# Altium PCB Ant_Robot_Controller.PcbDoc
Units mil, origin at the board's own origin, x right, y up, seen from the top; angles counter-clockwise.
Board outline 5605.03 x 1845.03 mil, 2 copper layers (Top Layer, Bottom Layer); 8 components, 11 nets, 47 pads, 18 vias.
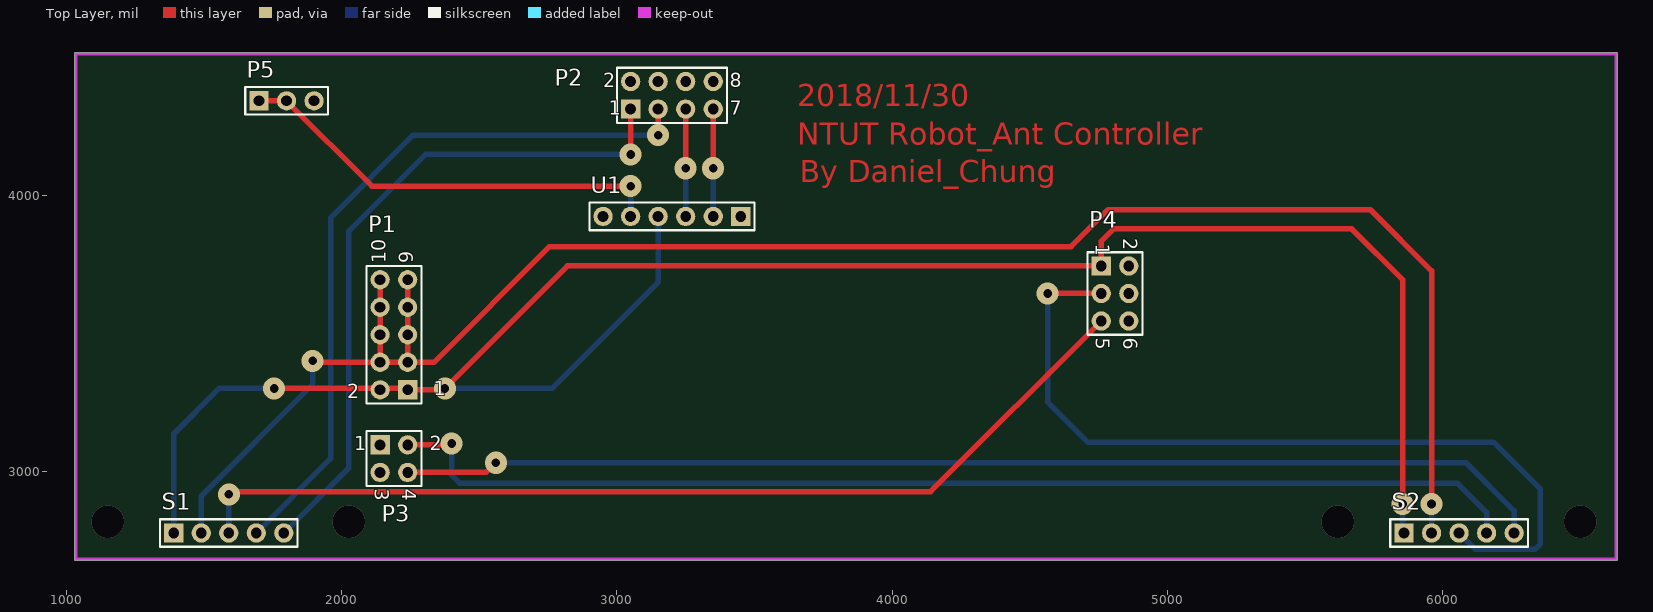
[diagram p0: Top Layer view]
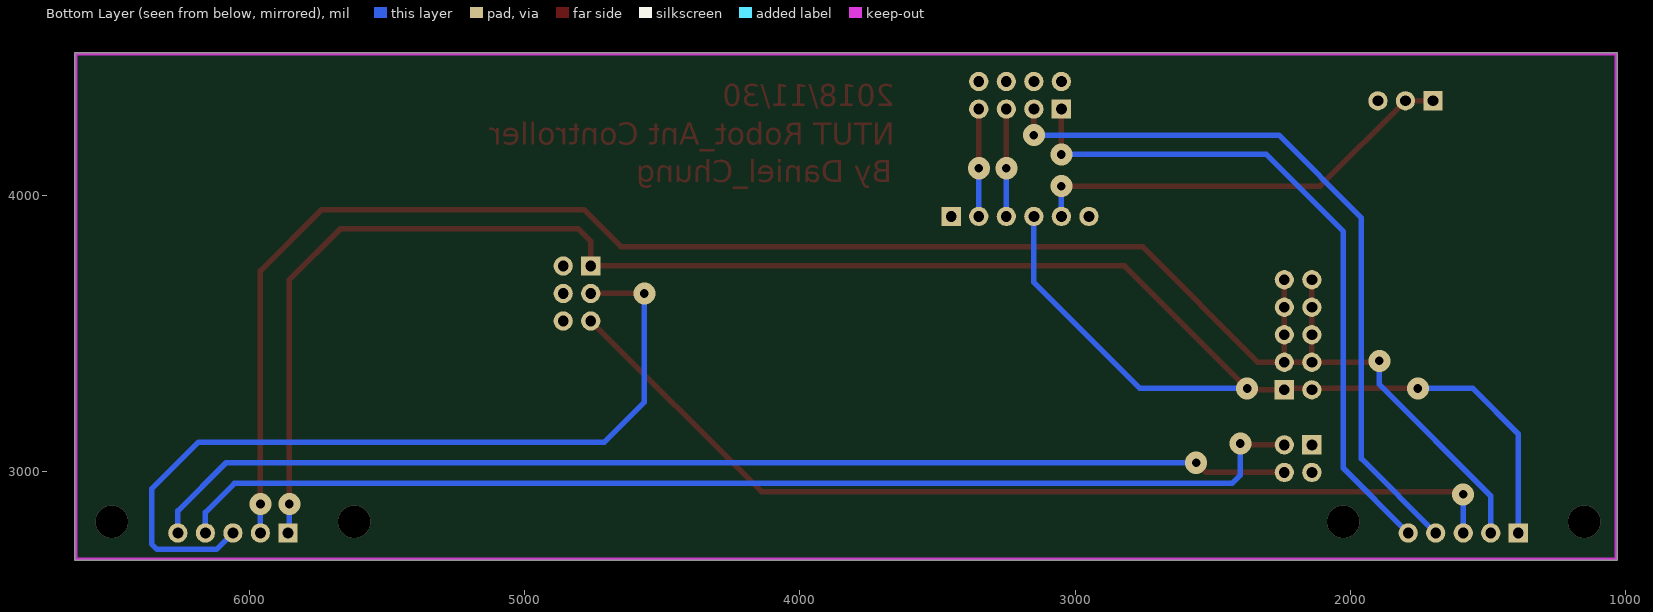
[diagram p1: Bottom Layer view, seen from below]

## Layer stack, top to bottom
Top Solder: solder mask 0.4, Solder Resist, Dk 3.5
Top Layer: signal copper 1.4
Dielectric 1: dielectric 12.6, FR-4, Dk 4.8
Bottom Layer: signal copper 1.4
Bottom Solder: solder mask 0.4, Solder Resist, Dk 3.5

## Board outline
1035,2674.99 cw(c1035,2680) 1029.98,2680 1029.98,4515 cw(c1035,4515) 1035,4520.02 6630,4520.02 cw(c6630,4515) 6635.01,4515 6635.02,2680 cw(c6630,2680) 6630,2674.99

## Design rules (kind name [scope] priority, off if disabled: settings)
Clearance [All] p1: gap=10 ignorepadtopadclearanceinfootprint=FALSE except(0: Arc-Hole Track-Hole SMDPad-Hole THPad-Hole Via-Hole Fill-Hole Poly-Hole Region-Hole Text-Hole)
PolygonConnect [All] p1: connectstyle=Relief reliefconductorwidth=10 reliefentries=4 polygonreliefangle="90 Angle" airgapwidth=10
RoutingVias [All] p1: holewidth=28 width=50 viastyle="Through Hole" minholewidth=28 minwidth=50 maxholewidth=28 maxwidth=50
SolderMaskExpansion [All] p1: expansion=4 istentingtop=FALSE
Width [All] p1: maxlimit=30 minlimit=20 preferedwidth=25
30 further rules are at their usual default settings.

## Components (designator, comment, footprint, x,y, rotation, side; value= is the part's Value field where it differs from the comment)
P1 "Power" HDR2X5 2240,3295 r90 top
P2 "ADC23_UART910" HDR2X4 3050,4315 r0 top
P3 "ADC23" HDR2X2 2140,3095 r270 top
P4 "SW" HDR2X3 4760,3745 r270 top
P5 "power_5v" HDR1X3 1700,4345 r0 top
S1 "Joy_Stick" HDR1X5 1390,2775 r0 top
S2 "Joy_Stick" HDR1X5 5860,2775 r0 top
U1 "HC05" HDR1X6 3450,3925 r180 top

## Footprints (in the part's own frame and the unit in brackets; to place one, negate y for a bottom-side part, rotate by r counter-clockwise, add the part's x,y. Pads: shape width x height; smd on the part's side, far side on the other; paste and mask are expansions set on the pad)
HDR1X3 [mil] "Connector; Header; 3 Position"
  rect 70x70 hole 39.37: 1(0,0)
  round 70 hole 39.37: 2(100,0) 3(200,0)
  silkscreen extent -50,-50 250,50
HDR1X5 [mil] "Connector; Header; 5 Position"
  rect 70x70 hole 39.37: 1(0,0)
  round 70 hole 39.37: 2(100,0) 3(200,0) 4(300,0) 5(400,0)
  silkscreen extent -50,-50 450,50
HDR1X6 [mil] "Connector; Header; 6 Position"
  rect 70x70 hole 39.37: 1(0,0)
  round 70 hole 39.37: 2(100,0) 3(200,0) 4(300,0) 5(400,0) 6(500,0)
  silkscreen extent -50,-50 550,50
HDR2X2 [mil] "Connector; Header; 2x2 Position"
  rect 70x70 hole 39.37: 1(0,0)
  round 70 hole 39.37: 2(0,100) 3(100,0) 4(100,100)
  silkscreen extent -50,-50 150,150
HDR2X3 [mil] "Connector; Header; 3x2 Position"
  rect 70x70 hole 39.37: 1(0,0)
  round 70 hole 39.37: 2(0,100) 3(100,0) 4(100,100) 5(200,0) 6(200,100)
  silkscreen extent -50,-50 250,150
HDR2X4 [mil] "Connector; Header; 4x2 Position"
  rect 70x70 hole 39.37: 1(0,0)
  round 70 hole 39.37: 2(0,100) 3(100,0) 4(100,100) 5(200,0) 6(200,100) 7(300,0) 8(300,100)
  silkscreen extent -50,-50 350,150
HDR2X5 [mil] "Connector; Header; 5x2 Position"
  rect 70x70 hole 39.37: 1(0,0)
  round 70 hole 39.37: 2(0,100) 3(100,0) 4(100,100) 5(200,0) 6(200,100) 7(300,0) 8(300,100) 9(400,0) 10(400,100)
  silkscreen extent -50,-50 450,150

## Part data
P1: library part "Header 5X2", "Header, 5-Pin, Dual row"
P2: library part "Header 4X2", "Header, 4-Pin, Dual row"
P3: library part "Header 2X2", "Header, 2-Pin, Dual row"
P4: library part "Header 3X2", "Header, 3-Pin, Dual row"
P5: library part "Header 3", "Header, 3-Pin"
S1 S2: library part "Header 5", "Header, 5-Pin"
U1: library part "Header 6", "Header, 6-Pin"

## Via types
v1: diameter 80, hole 31.5, Top Layer to Bottom Layer, 14 vias
v2: diameter 118.11, hole 118.11, Top Layer to Bottom Layer, 4 vias

## Nets (pads, with @x,y where several pads share a name; then routed paths per layer and width w, separated by ;. In a path a pad name is that pad's centre, name@x,y a point inside that pad or via, vN(x,y) a via of type N, cw(c..) or ccw(c..) an arc to the next point about the centre after c; other vN are vias at no path point)
+3V3: P1.3 P1.4 P1.5 P1.6 P1.7 P1.8 P1.9 P1.10 S1.2 S2.2 | length 6727.2
  Top Layer w20: v1@1900,3395 P1.4 ; P1.10 P1.8 P1.6 P1.4 ; P1.9 P1.7 P1.5 P1.3 ; v1(5960,2880) 5960,3727.28 5737.28,3950 4785,3950 4650,3815 2755,3815 2335,3395 P1.3 ; P1.4 P1.3
  Bottom Layer w20: S1.2 1490,2910 1895,3315 v1(1895,3400) ; S2.2 v1(5960,2880)
+5V: P5.1 P5.2 U1.5 | length 1588.4
  Top Layer w20: P5.1 P5.2 2110,4035 v1(3050,4035)
  Bottom Layer w20: U1.5 v1(3050,4035)
GND: P1.1 P1.2 P4.1 S1.1 S2.1 U1.4 | length 7362.4
  Top Layer w20: v1(1755,3300) P1.1@2235,3300 ; P1.1 v1@2370,3295 ; v1(2375,3300) 2820,3745 P4.1 4760,3835 4805,3880 5670,3880 5855,3695 v1(5855,2880)
  Bottom Layer w20: S1.1 1390,3135 1555,3300 v1@1750,3300 ; v1@2350,3300 v1(2375,3300) 2765,3300 3150,3685 U1.4 ; S2.1@5855,2780 v1(5855,2880)
PA2: P2.3 S1.4 | length 2666.1
  Top Layer w20: v1(3150,4220) P2.3
  Bottom Layer w20: S1.4 1960,3045 1960,3920 2260,4220 v1(3150,4220)
PA3: P2.1 S1.5 | length 2504.5
  Top Layer w20: v1(3050,4150) P2.1
  Bottom Layer w20: S1.5 2025,3010 2025,3870 2305,4150 3035,4150 v1@3050,4165
PA9: P2.7 U1.2 | length 390
  Top Layer w20: v1(3350,4100) P2.7
  Bottom Layer w20: U1.2 v1(3350,4100)
PA10: P2.5 U1.3 | length 390
  Top Layer w20: v1(3250,4100) P2.5
  Bottom Layer w20: U1.3 v1(3250,4100)
PB8: P4.5 S1.3 | length 3571
  Top Layer w20: v1(1590,2915) 1600,2925 4140,2925 P4.5
  Bottom Layer w20: S1.3 v1(1590,2915)
PB9: P4.3 S2.3 | length 3038.6
  Top Layer w20: v1(4565,3645) P4.3
  Bottom Layer w20: v1(4565,3645) 4565,3250 4710,3105 6185,3105 6355,2935 6355,2735 6335,2715 6120,2715 S2.3
PC2: P3.2 S2.4 | length 4160.9
  Top Layer w20: P3.2 v1@2395,3095
  Bottom Layer w20: v1(2400,3100) 2400,2985 2430,2955 6055,2955 6160,2850 S2.4
PC3: P3.4 S2.5 | length 4187
  Top Layer w20: P3.4 2525,2995 v1(2560,3030)
  Bottom Layer w20: v1(2560,3030) 6085,3030 6260,2855 S2.5
pads on no net: P2.2 P2.4 P2.6 P2.8 P3.1 P3.3 P4.2 P4.4 P4.6 P5.3 U1.1 U1.6
copper on no net:
  other v2: 1150,2815 2025,2815 5620,2815 6500,2815

## Keep-outs
Keep-Out Layer:
  lines w10: 1035,2680 6630,2680 6630,4515 1035,4515 1035,2680

## Other copper
Top Layer:
  text "2018/11/30" at 3655,4325 h80
  text "NTUT Robot_Ant Controller" at 3655,4185 h80
  text "By Daniel_Chung" at 3665,4050 h80

## Text inside footprints (layer, text, board x,y; h text height)
P1: Top Overlay "2" at 2020,3265 h50; Top Overlay "1" at 2335,3275 h50; Top Overlay "9" at 2260,3755 h50 r90; Top Overlay "10" at 2160,3755 h50 r90
P2: Top Overlay "2" at 2950,4395 h50; Top Overlay "1" at 2970,4295 h50; Top Overlay "7" at 3410,4295 h50; Top Overlay "8" at 3410,4395 h50
P3: Top Overlay "3" at 2120,2935 h50 r270; Top Overlay "4" at 2220,2935 h50 r270; Top Overlay "2" at 2320,3075 h50; Top Overlay "1" at 2045,3075 h50
P4: Top Overlay "1" at 4740,3825 h50 r270; Top Overlay "2" at 4840,3845 h50 r270; Top Overlay "5" at 4740,3485 h50 r270; Top Overlay "6" at 4840,3485 h50 r270